# Altium PCB zjb.PcbDoc
Units mil, origin at the board's own origin, x right, y up, seen from the top; angles counter-clockwise.
Board outline 2355 x 1760 mil, 2 copper layers (Top Layer, Bottom Layer); 39 components, 20 nets, 124 pads, 0 vias.
Unrouted connection lines stored in the file: 1.
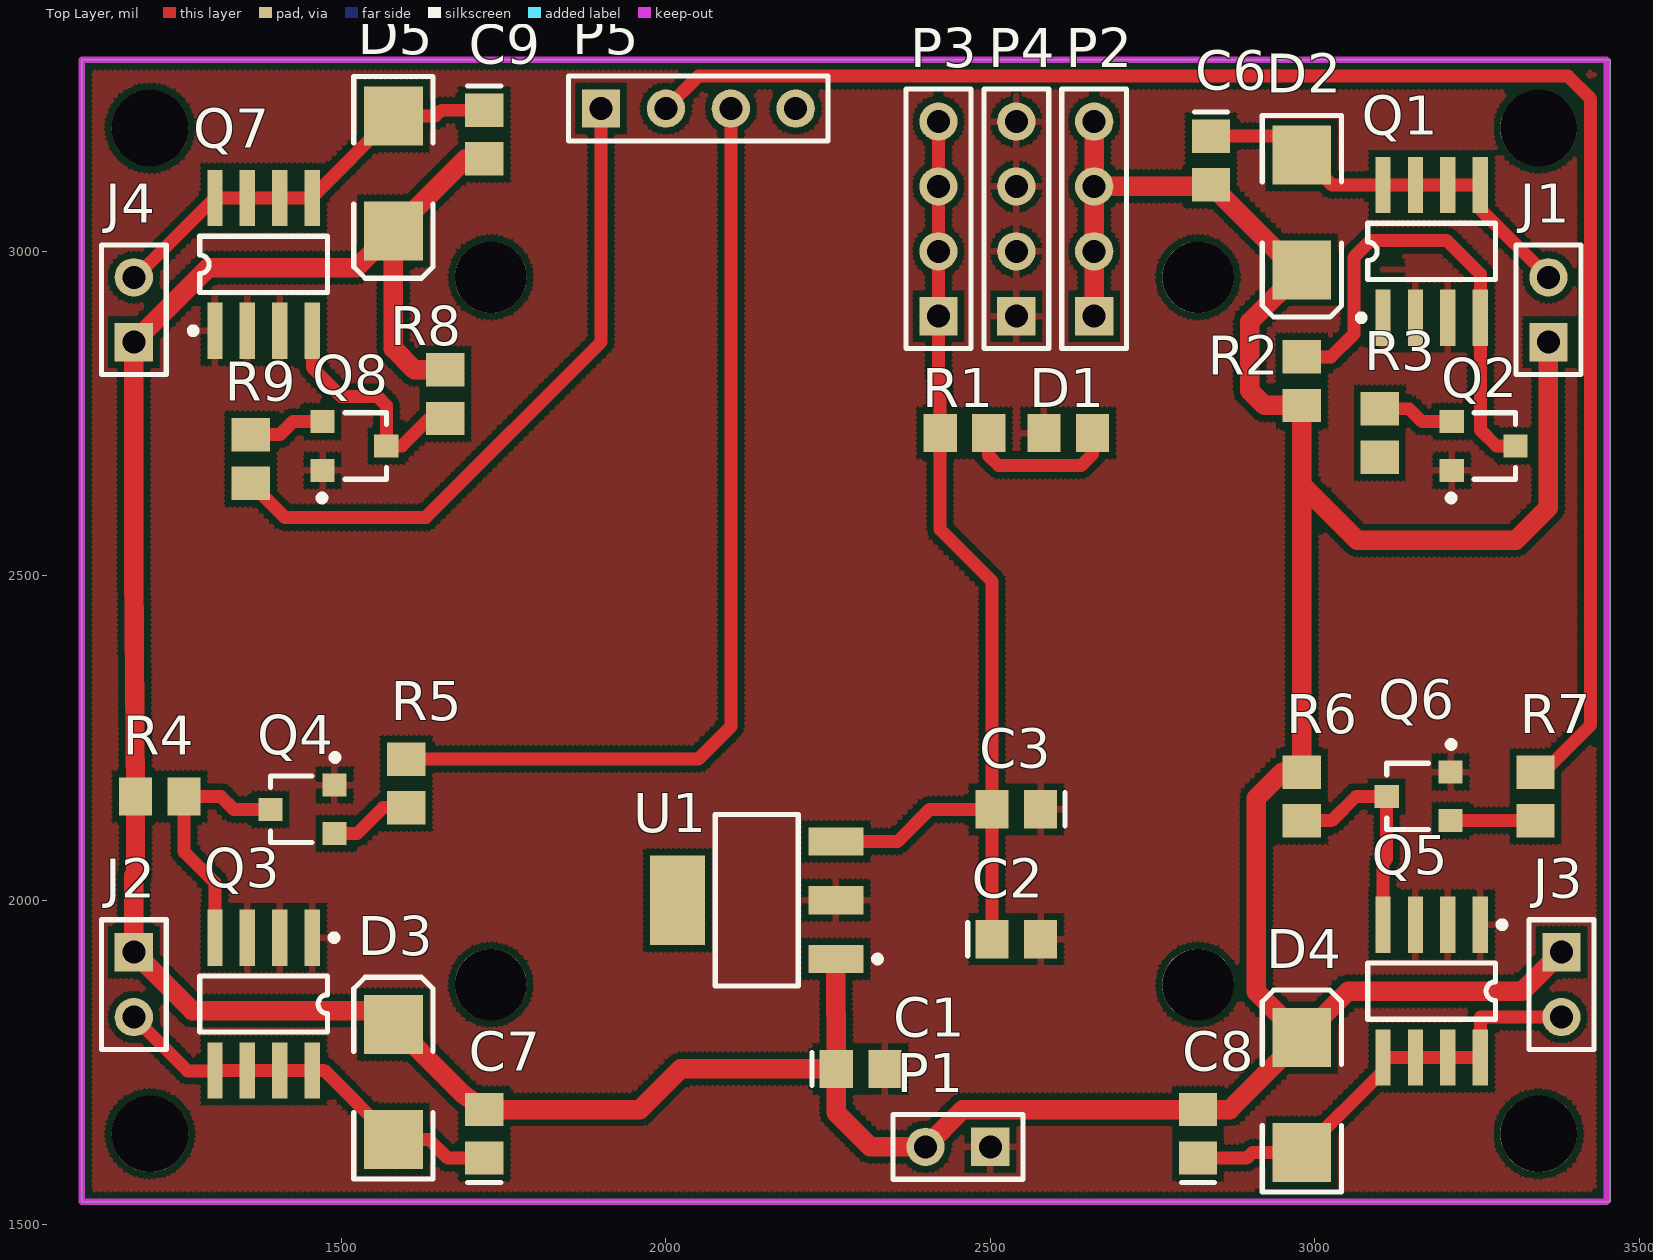
[diagram p0: Top Layer view]
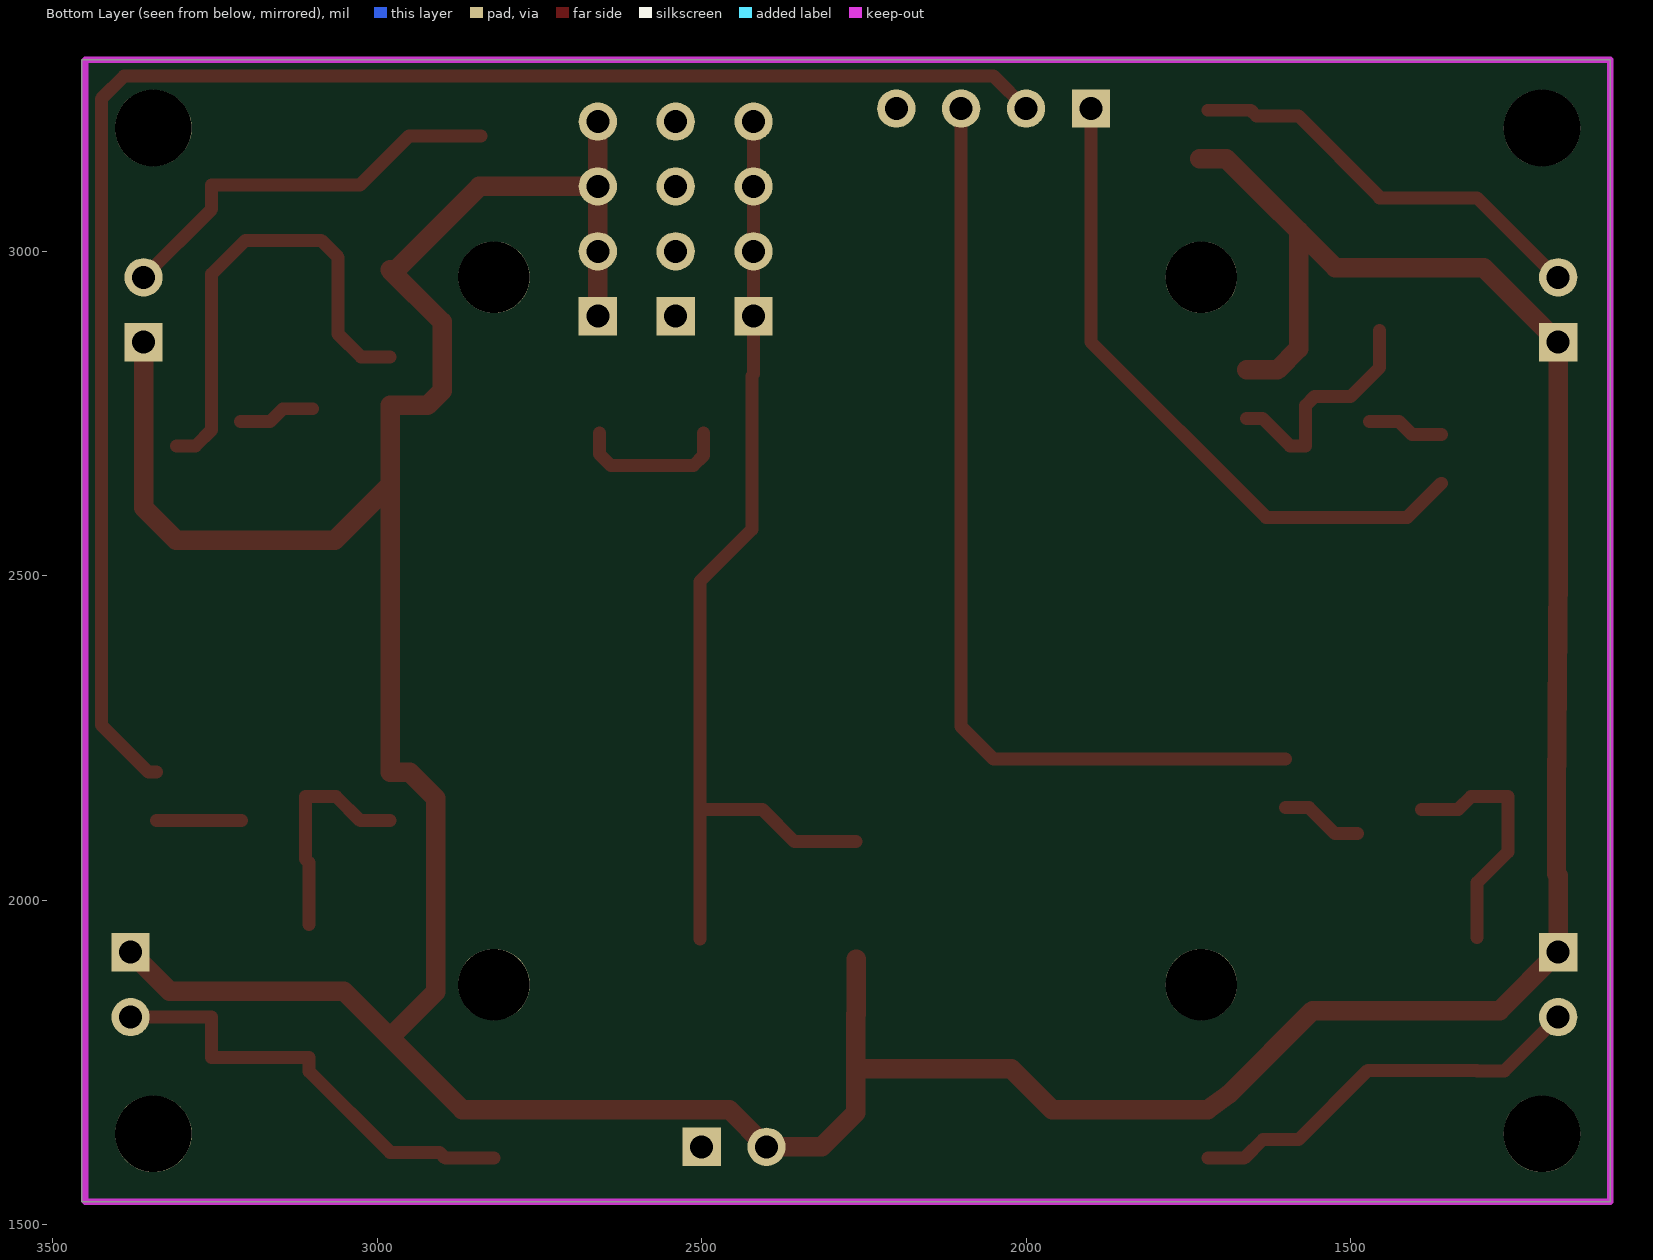
[diagram p1: Bottom Layer view, seen from below]

## Layer stack, top to bottom
Top Layer: signal copper 1.4
Dielectric: dielectric 12.6, FR-4, Dk 4.8
Bottom Layer: signal copper 1.4

## Board outline
1100,3295 1100,1535 3455,1535 3455,3295

## Design rules (kind name [scope] priority, off if disabled: settings)
Clearance [All] p1: gap=10
ComponentClearance [All] p1: gap=10 collisioncheckmode=3 verticalgap=10
PolygonConnect [All] p1: connectstyle=Relief reliefconductorwidth=10 reliefentries=4 polygonreliefangle="90 Angle"
RoutingVias [All] p1: holewidth=28 width=50 viastyle="Through Hole" minholewidth=28 minwidth=50 maxholewidth=28 maxwidth=50
SolderMaskExpansion [All] p1: expansion=4
TestPointUsage [All] p1: valid=0 allowmultiple=FALSE
Testpoint [All] p1: side=15 testpointundercomponent=TRUE minsize=40 maxsize=100 preferedsize=60 minholesize=0 maxholesize=40 preferedholesize=32 testpointgrid=1 style=1023 order=0-112345678
Width [All] p1: maxlimit=30 minlimit=15 preferedwidth=20
18 further rules are at their usual default settings.

## Components (designator, comment, footprint, x,y, rotation, side; value= is the part's Value field where it differs from the comment)
C1 "Cap Pol3" C0805 2300,1740 r0 top
C2 "Cap Pol3" C0805 2540,1940 r0 top
C3 "Cap" C0805 2540,2140 r180 top
C6 "Cap" C0805 2840,3140 r270 top
C7 "Cap" C0805 1720,1640 r90 top
C8 "Cap" C0805 2820,1640 r90 top
C9 "Cap" C0805 1720,3180 r270 top
D1 "LED1" 6-0805 2620,2720 r180 top
D2 "SS34" SMB 2980,3060 r270 top
D3 "SS34" SMB 1580,1720 r90 top
D4 "SS34" SMB 2980,1700 r90 top
D5 "SS34" SMB 1580,3120 r270 top
J1 "CON2" HDR1X2 3360,2860 r90 top
J2 "CON2" HDR1X2 1180,1920 r270 top
J3 "CON2" HDR1X2 3380,1920 r270 top
J4 "CON2" HDR1X2 1180,2860 r90 top
P1 "Header 2" HDR1X2 2500,1620 r180 top
P2 "VBAT" HDR1X4 2660,2900 r90 top
P3 "+5" HDR1X4 2420,2900 r90 top
P4 "GND" HDR1X4 2540,2900 r90 top
P5 "PWM" HDR1X4 1900,3220 r0 top
Q1 "SI4404" SO8 3180,3000 r0 top
Q2 "NPN" SOT-23 3260,2700 r270 top
Q3 "SI4404" SO8 1380,1840 r180 top
Q4 "NPN" SOT-23 1440,2140 r90 top
Q5 "SI4404" SO8 3180,1860 r180 top
Q6 "NPN" SOT-23 3160,2160 r90 top
Q7 "SI4404" SO8 1380,2980 r0 top
Q8 "NPN" SOT-23 1520,2700 r270 top
R1 "Res2" 6-0805 2460,2720 r0 top
R2 "Res2" 6-0805 2980,2800 r270 top
R3 "Res2" 6-0805 3100,2720 r90 top
R4 "Res2" 6-0805 1220,2160 r180 top
R5 "Res2" 6-0805 1600,2180 r270 top
R6 "Res2" 6-0805 2980,2160 r90 top
R7 "Res2" 6-0805 3340,2160 r270 top
R8 "Res2" 6-0805 1660,2780 r90 top
R9 "Res2" 6-0805 1360,2680 r90 top
U1 "LM1117" SOT223 2140,2000 r90 top

## Footprints (in the part's own frame and the unit in brackets; to place one, negate y for a bottom-side part, rotate by r counter-clockwise, add the part's x,y. Pads: shape width x height; smd on the part's side, far side on the other; paste and mask are expansions set on the pad)
6-0805 [mm] "Chip Resistor; Body 2.0 x 1.3 mm (LxW typ)"
  rect 1.3x1.5 smd: 1(-0.95,0) 2(0.95,0)
C0805 [mm] "Chip Capacitor; Body 2.0 x 1.2 mm (LxW typ)"
  rect 1.3x1.5 smd: 1(-0.95,0) 2(0.95,0)
  silkscreen extent -1.9,-0.65 -1.9,0.65
HDR1X2 [mm] "Connector; Header; 2 Position"
  rect 1.5x1.5 hole 0.9: 1(0,0)
  round 1.5 hole 0.9: 2(2.54,0)
  silkscreen extent -1.27,-1.27 3.81,1.27
HDR1X4 [mm] "Connector; Header; 4 Position"
  rect 1.5x1.5 hole 0.9: 1(0,0)
  round 1.5 hole 0.9: 2(2.54,0) 3(5.08,0) 4(7.62,0)
  silkscreen extent -1.27,-1.27 8.89,1.27
SMB [mm] "DO-214-AA/SMB; 2 C-Bend Leads; Body 5.3 x 3.6 mm, inc. leads (LxW)"
  rect 2.3x2.3 smd: 1(-2.25,0) 2(2.25,0)
  silkscreen extent -3.8,-1.55 4.1,1.55
SO8 [mm] "Small Outline; 8 Leads; Body Width 3.9 mm; Pitch 1.27 mm"
  rect 0.6x2.2 smd: 1(-1.905,-2.6) 2(-0.635,-2.6) 3(0.635,-2.6) 4(1.905,-2.6) 5(1.905,2.6) 6(0.635,2.6) 7(-0.635,2.6) 8(-1.905,2.6)
  silkscreen extent -2.88,-2.72 2.5,1.1
SOT223 [mm] "SOT-223/SC-73; 4 Leads; Body 6.7 x 7.3 mm, inc. leads (LxW max)"
  rect 1.1x2.15 smd: 1(-2.3,-3.1) 2(0,-3.1) 3(2.3,-3.1)
  rect 3.5x2.15 smd: 4(0,3.1)
  silkscreen extent -3.35,-4.85 3.35,1.62
SOT-23 [mm] "SOT-23; 3 Leads; Body 3.0 x 2.6 mm, inc. leads (LxW max)"
  rect 0.9x0.95 smd: 1(0.95,-1.25) 2(-0.95,-1.25) 3(0,1.25)
  silkscreen extent -1.3,-1.39 2.16,1.25

## Part data
C1 C2: "Polarized Capacitor (Surface Mount)"
C3 C6 C7 C8 C9: "Capacitor"
D1: library part LED0, "Typical INFRARED GaAs LED"
D2 D3 D4 D5: library part Diode, "Default Diode"
J1 J2 J3 J4: library part "Header 2", "Header, 2-Pin"
P1: "Header, 2-Pin"
P2 P3 P4 P5: library part "Header 4", "Header, 4-Pin"
Q1 Q3 Q5 Q7: library part Component_1
Q2 Q4 Q6 Q8: library part 2N3904, "NPN General Purpose Amplifier"
R1 R2 R3 R4 R5 R6 R7 R8 R9: "Resistor"
U1: library part "Volt Reg", "Voltage Regulator"

## Free pads (board coordinates)
  round 118.11 hole 118.11: 0(1205,1640) 1(3345,1640) 2(3345,3190) 3(1205,3190)
  round 110.24 hole 110.24: 0(1730,1870) 1(2820,1870) 2(2820,2960) 3(1730,2960)

## Nets (pads, with @x,y where several pads share a name; then routed paths per layer and width w, separated by ;. In a path a pad name is that pad's centre, name@x,y a point inside that pad or via, vN(x,y) a via of type N, cw(c..) or ccw(c..) an arc to the next point about the centre after c; other vN are vias at no path point)
+5: C2.1 C3.2 P3.1 P3.2 P3.3 P3.4 R1.1 U1.3 | length 1555.2
  Top Layer w20: U1.3 2357,2090.55 2406.45,2140 C3.2 ; P3.4 P3.3 P3.2 P3.1 2420,2810.6 2422.6,2808 R1.1 2422.6,2571.4 2502.6,2491.4 C3.2 ; C2.1 C3.2
GND: C1.2 C2.2 C3.1 D1.2 P1.1 P4.1 P4.2 P4.3 P4.4 Q1.1 Q1.2 Q1.3 Q2.1 Q3.1 Q3.2 Q3.3 Q4.1 Q5.1 Q5.2 Q5.3 Q6.1 Q7.1 Q7.2 Q7.3 Q8.1 U1.2
NetC6_1: C6.1 D2.1 J1.2 Q1.5 Q1.6 Q1.7 Q1.8 | length 631.9
  Top Layer w20: C6.1 2951.18,3177.4 3026.22,3102.36 Q1.5 3255,3065 J1.2
NetC7_1: C7.1 D3.1 J2.2 Q3.5 Q3.6 Q3.7 Q3.8 | length 631.5
  Top Layer w20: J2.2 1263,1737 1305,1737 Q3.5 Q3.6 Q3.7 Q3.8 1455,1738 1473.42,1738 D3.1 1635,1631.42 1663.82,1602.6 C7.1
NetC8_1: C8.1 D4.1 J3.2 Q5.5 Q5.6 Q5.7 Q5.8 | length 699
  Top Layer w20: C8.1 2895,1602.6 2903.82,1611.42 D4.1 3105,1736.42 Q5.5 Q5.6 Q5.7 Q5.8 3255,1820 J3.2
NetC9_1: C9.1 D5.1 J4.2 Q7.5 Q7.6 Q7.7 Q7.8 | length 647.3
  Top Layer w20: J4.2 1182.64,2960 Q7.8 Q7.5 1455,3083.58 D5.1 1645,3208.58 1653.82,3217.4 C9.1
NetD1_1: D1.1 R1.2 | length 240.9
  Top Layer w20: R1.2 2497.4,2685.1 2512.5,2670 2639.9,2670 2657.4,2687.5 D1.1
NetQ1_4: Q1.4 Q2.3 R2.1 | length 744.8
  Top Layer w20: R2.1 3025,2837.4 3060,2872.4 3060,2990.75 3086.25,3017 3203,3017 3255,2965 3255,2725 3280,2700 Q2.3
NetQ2_2: Q2.2 R3.2 | length 119.1
  Top Layer w20: R3.2 3145,2757.4 3165,2737.4 Q2.2
NetQ3_4: Q3.4 Q4.3 R4.1 | length 379
  Top Layer w20: Q3.4 1305,2027 1257.4,2074.6 R4.1 1314,2160 1334,2140 Q4.3
NetQ4_2: Q4.2 R5.2 | length 127.4
  Top Layer w20: Q4.2 1524,2102.6 1564,2142.6 R5.2
NetQ5_4: Q5.4 Q6.3 R6.1 | length 346.3
  Top Layer w20: R6.1 3026,2122.6 3063.4,2160 Q6.3 3110.79,2063.79 3105,2058 Q5.4
NetQ6_2: Q6.2 R7.2 | length 130.8
  Top Layer w20: Q6.2 R7.2
NetQ7_4: Q7.4 Q8.3 R8.1 | length 366
  Top Layer w20: Q7.4 1455,2821 1500,2776 1555.71,2776 1569.21,2762.5 Q8.3 1593,2700 1635.6,2742.6 R8.1
NetQ8_2: Q8.2 R9.2 | length 119.1
  Top Layer w20: R9.2 1405,2717.4 1425,2737.4 Q8.2
PWM1: P5.4 R3.1
PWM2: P5.3 R5.1 | length 1473.3
  Top Layer w20: R5.1 2050,2217.4 2100,2267.4 P5.3
PWM3: P5.2 R7.1 | length 2540.3
  Top Layer w20: P5.2 2050,3270 3390,3270 3425,3235 3425,2270 3352.4,2197.4 R7.1
PWM4: P5.1 R9.1 | length 1033.6
  Top Layer w20: R9.1 1412.6,2590 1630,2590 1900,2860 P5.1
VBAT: C1.1 C6.2 C7.2 C8.2 C9.2 D2.2 D3.2 D4.2 D5.2 J1.1 J2.1 J3.1 J4.1 P1.2 P2.1 P2.2 P2.3 P2.4 R2.2 R4.2 R6.2 R8.2 U1.1 | length 7315.8
  Top Layer w30: D5.2 1580,2850 1612.6,2817.4 R8.2 ; C9.2@1732.6,3142.6 1691.18,3142.6 1523.58,2975 1295,2975 J4.1 1180,2512.6 R4.2 1182.6,2040.6 1180,2038 J2.1 1270,1830 1558.58,1830 1687.5,1701.08 C7.2 1960,1677.4 2022.6,1740 C1.1 ; U1.1 2262.05,1824.55 2262.6,1824 2262.6,1672.4 2315,1620 P1.2 2457.4,1677.4 2868.82,1677.4 3051.42,1860 3320,1860 J3.1 ; P2.1 P2.4 ; P2.3 2842.6,3100 2971.18,2971.42 D2.2 2900,2891.42 2900,2785 2922.4,2762.6 R2.2 R6.2 2950,2197.4 2910,2157.4 2910,1858.58 D4.2 ; 2980,2640 3065,2555 3310,2555 3360,2605 J1.1
pads on no net: U1.4

## Polygon pours and split planes (outlines as drawn)
GND on Top Layer "Keep-Out Layer-No Net" (hatched 90Degree grid 0 track 8, pour order 1000): 1100,3295 3450,3295 3450,1535 1100,1535

## Keep-outs
Keep-Out Layer:
  lines w10: 1100,1535 3450,1535 3450,3295 1100,3295 1100,1535